# Altium PCB RFM_Temperature_2.0.0.PcbDoc
Units mil, origin at the board's own origin, x right, y up, seen from the top; angles counter-clockwise.
Board outline 1062.99 x 1074.8 mil, 2 copper layers (L1, L4), stack 57.952 mil thick; 41 components, 29 nets, 149 pads, 63 vias.
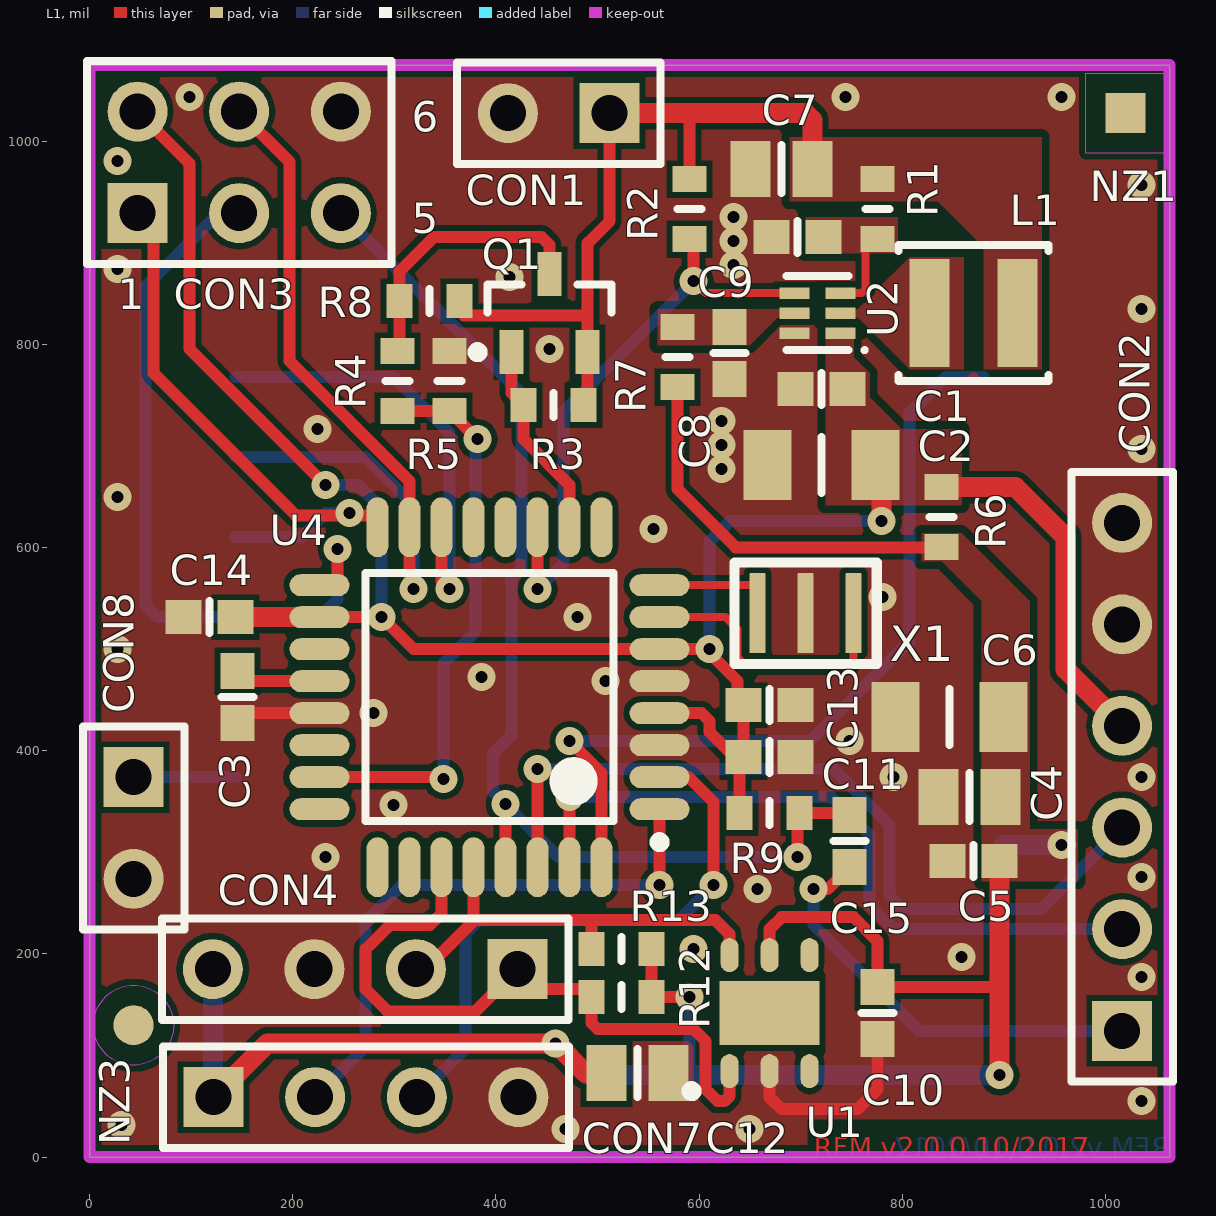
[diagram p0: L1 view]
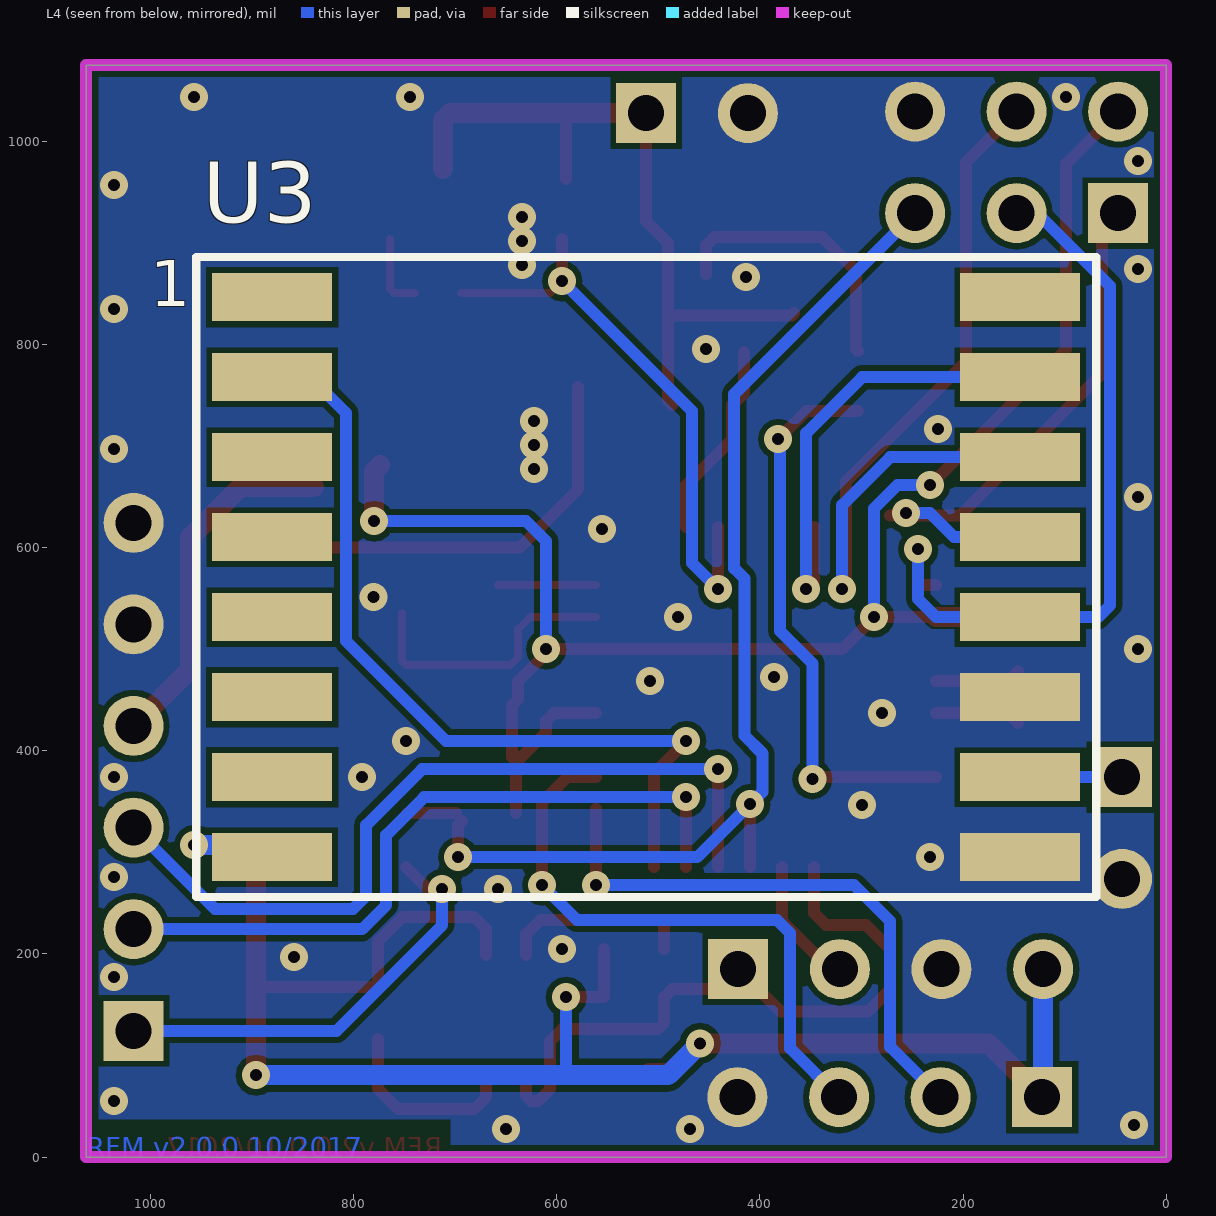
[diagram p1: L4 view, seen from below]
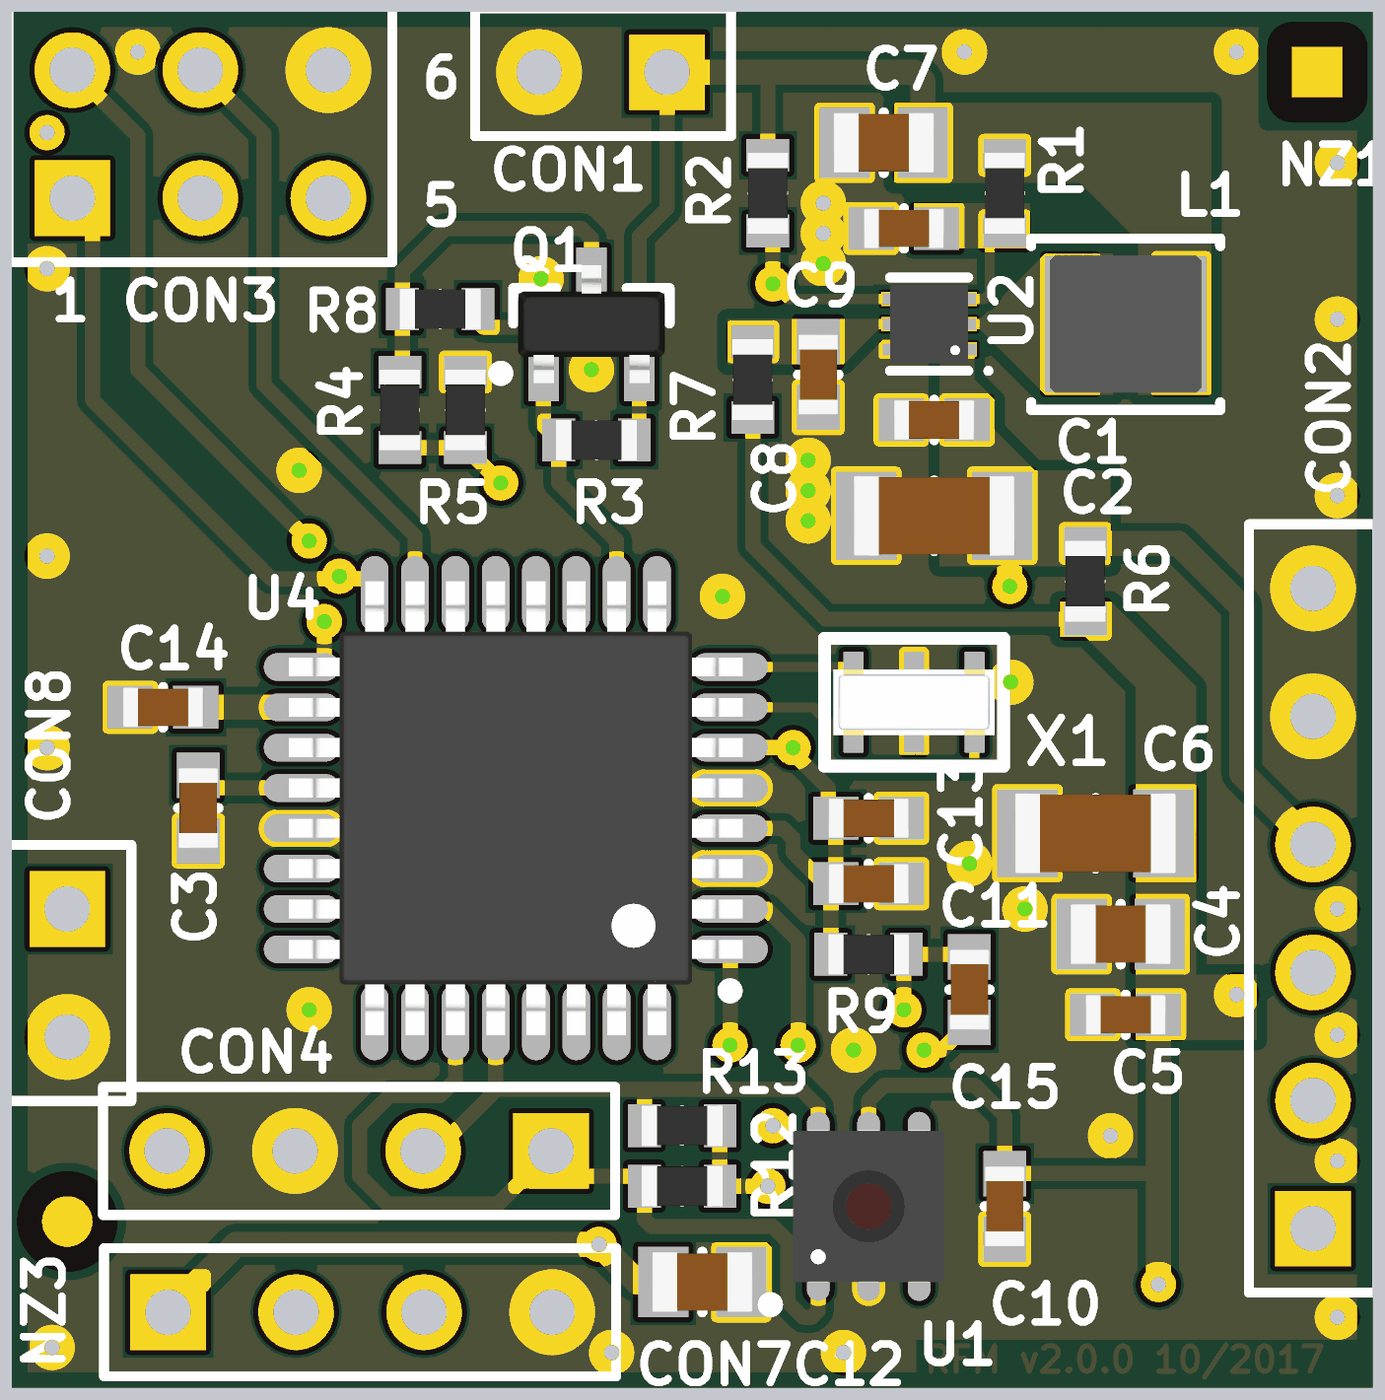
[diagram p2: 3D render of the assembled board from above, using the file's embedded part models]

## Layer stack, top to bottom
Top Solder: solder mask 0.787, Solder Resist, Dk 3.5
L1: signal copper 1.4169
Dielectric 1: core 55.1181, IS400, Dk 4.2
L4: signal copper 1.4169
Bottom Solder: solder mask 0.787, Solder Resist, Dk 3.5

## Board outline
0,0 0,1074.8 1062.99,1074.8 1062.99,0

## Design rules (kind name [scope] priority, off if disabled: settings)
AssemblyTestPointUsage SilkToBoardRegionClearance_1 [All] p2:
AssemblyTestPointUsage SilkToBoardRegionClearance_2 [All] p3:
Clearance [All] p1: gap=6 ignorepadtopadclearanceinfootprint=FALSE except(0: Arc-Hole Track-Hole SMDPad-Hole THPad-Hole Via-Hole Fill-Hole Poly-Hole Region-Hole Text-Hole; 8: Poly-Poly)
ComponentClearance ComponentClearance_Battery [All vs InComponent('BT1')] p1: gap=0 collisioncheckmode=3 verticalgap=0 showdistances=FALSE
ComponentClearance [All] p2: gap=10 collisioncheckmode=3 verticalgap=10 showdistances=FALSE
HoleSize [All] p1: absolutevalues=TRUE maxlimit=250 minlimit=11.81 maxpercent=80.000 minpercent=20.000
MatchedLengths DiffPair_DIFF100MatchedLengths [InDifferentialPairClass('DIFF100')] p1: tolerance=6 checknetsindiffpair=TRUE checkdiffpairvsdiffpair=FALSE checkxsignals=FALSE checkothers=FALSE
MinimumSolderMaskSliver [All] p1: minsoldermaskwidth=3.94
MinimumSolderMaskSliver SilkscreenOverComponentPads_2 [All] p2: minsoldermaskwidth=10
MinimumSolderMaskSliver SilkToSolderMaskClearance_1 [IsPad] p3: minsoldermaskwidth=10
MinimumSolderMaskSliver SilkscreenOverComponentPads_1 [All] p4: minsoldermaskwidth=10
MinimumSolderMaskSliver SilkToSolderMaskClearance [IsPad] p5: minsoldermaskwidth=10
MinimumSolderMaskSliver SilkscreenOverComponentPads [All] p6: minsoldermaskwidth=10
PolygonConnect [All] p1: connectstyle=Direct reliefconductorwidth=10 reliefentries=4 polygonreliefangle="90 Angle" airgapwidth=10
RoutingVias [All] p1: holewidth=11.81 width=27.56 viastyle="Through Hole" minholewidth=11.81 minwidth=25.59 maxholewidth=39.37 maxwidth=50
SilkToSolderMaskClearance SilkToSolderMaskClearance_2 [IsPad] p1: minsilkscreentomaskgap=10 clearancetoexposedcopper=TRUE
SolderMaskExpansion SolderMaskExpansion_Via [IsVia] p1: expansion=0.39 soldermaskfromhole=TRUE
SolderMaskExpansion [All] p2: expansion=4
Width [All] p1: maxlimit=100 minlimit=6 preferedwidth=10
26 further rules are at their usual default settings.

## Classes and differential pairs
differential pair class DIFF100: CH1_TRX0 CH1_TRX1 CH1_TRX2 CH1_TRX3 CH2_TRX0 CH2_TRX1 CH2_TRX2 CH2_TRX3 CLK1 DRAM_SDCKL0 DRAM_SDCKL1 DRAM_SDQS0 DRAM_SDQS1 DRAM_SDQS2 DRAM_SDQS3 DRAM_SDQS4 DRAM_SDQS5 DRAM_SDQS6 DRAM_SDQS7 HDMI_CLK HDMI_D0 HDMI_D1 HDMI_D2 HDMI_OUT_CLK HDMI_OUT_D0 HDMI_OUT_D1 HDMI_OUT_D2 PCIE_REFCLK
differential pair class DIFF90: PCIE_CRX PCIE_CTX PCIE_RX PCIE_TX USB_HOST_D USB_OTG_D
net class "Power Net": NetC8_2 VCC_CPU

## Components (designator, comment, footprint, x,y, rotation, side; value= is the part's Value field where it differs from the comment)
C1 "10uF/6.3V/X5R" C-0603 720.47,755.91 r0 top
C2 "100u/10V X5R" C-1206 720.47,681.1 r0 top
C3 "100nF/16V" C-0603 145.67,452.76 r90 top
C4 "10u/10V" C-0805 866.14,354.33 r0 top
C5 "100nF/16V" C-0603 870.08,291.33 r0 top
C6 "100u/10V X5R" C-1206 846.46,433.07 r0 top
C7 "10u/10V" C-0805 681.1,972.44 r0 top
C8 "10uF/6.3V/X5R" C-0603 629.92,791.34 r90 top
C9 "100nF/16V" C-0603 696.85,905.51 r0 top
C10 "100nF/16V" C-0603 775.59,141.73 r90 top
C11 "100nF/16V" C-0603 669.29,393.7 r180 top
C12 "10u/10V" C-0805 539.37,82.68 r180 top
C13 "100nF/16V" C-0603 669.29,444.88 r180 top
C14 "100nF/16V" C-0603 118.11,531.5 r0 top
C15 "100nF/16V" C-0603 748.03,311.02 r270 top
CON1 "PAD1G02" HDR1X02S 511.81,1027.56 r180 top
CON2 "PAD1G06" HDR1X06S 1016.39,124.39 r90 top
CON3 "PAD2G06" HDR2X06S 47.24,929.13 r0 top
CON4 "PAD1G04" HDR1X04S 421.26,185.04 r180 top
CON7 "PAD1G04" HDR1X04S 122.04,59.05 r0 top
CON8 "PAD1G02" HDR1X02S 43.31,374.02 r270 top
L1 "SRN3015-4R7M" TLU-SRN3015 870.08,830.71 r180 top
NZ1 "Fiducial Rectangle" "Fiducial Rectangle" 1019.68,1027.56 r0 top
NZ3 "Fiducial Circle" "Fiducial Circle" 43.31,129.92 r90 top
Q1 "FDV304P" SOT23-3L 452.76,830.71 r90 top
R1 "470R" R-0603 775.59,933.07 r270 top value=470
R2 "1.87M 1%" R-0603 590.55,933.07 r90 top value=1.87M
R3 "100k 1%" R-0603 456.69,740.16 r0 top value=100k
R4 "787k 1%" R-0603 303.15,763.78 r90 top value=787k
R5 "100k 1%" R-0603 354.33,763.78 r270 top value=100k
R6 "0R" R-0603 838.58,629.92 r90 top value=0
R7 "0R" R-0603 578.74,787.4 r90 top value=0
R8 "0R" R-0603 334.65,842.52 r0 top value=0
R9 "10k" R-0603 669.29,338.58 r180 top
R12 "2.2k" R-0603 523.62,157.48 r0 top
R13 "2.2k" R-0603 523.62,204.72 r0 top
U1 "SI7006-A20" "DFN100P300X300X60_HS-7N - duplicate" 669.29,141.73 r90 top
U2 "TPS610986" SON50P150X80-6N 716.54,830.71 r180 top
U3 "RFM69HW-868" RFM69HW-XXXS2 511.82,570.87 r180 bottom
U4 "ATmega328P-AU" TQFP80P900X900X120-32N 393.7,452.76 r180 top
X1 "Resonator 8MHz" Resonator 704.72,535.43 r0 top

## Footprints (in the part's own frame and the unit in brackets; to place one, negate y for a bottom-side part, rotate by r counter-clockwise, add the part's x,y. Pads: shape width x height; smd on the part's side, far side on the other; paste and mask are expansions set on the pad)
C-0603 [mm]
  rect 0.9x0.85 smd: 1(-0.65,0) 2(0.65,0)
  silkscreen extent 0,-0.4 0,0.4, body extent -0.8,-0.4 0.8,0.4, height 0.8
C-0805 [mm]
  rect 1x1.4 smd: 1(-0.775,0) 2(0.775,0)
  silkscreen extent 0,-0.6 0,0.6, body extent -1,-0.6 1,0.6, height 1.2
C-1206 [mm]
  rect 1.2x1.75 smd: 1(-1.35,0) 2(1.35,0)
  silkscreen extent 0,-0.7 0,0.7, body extent -1.6,-0.8 1.6,0.8, height 1.6
"DFN100P300X300X60_HS-7N - duplicate" [mm] "DFN, 6-Leads, Body 3,00x3,00mm, Pitch 1,00mm, Thermal Pad 1,50x2,40mm, IPC Medium Density"
  rrect20% 1x1 on Top Paste paste+0 mask-5: 0(0,0.65) 0(0,-0.65)
  oval 0.85x0.45 smd: 1(-1.45,1) 2(-1.45,0) 3(-1.45,-1) 4(1.45,-1) 5(1.45,0) 6(1.45,1)
  rect 1.6x2.5 smd paste-5: 7(0,0)
  silkscreen extent -2.07,1.82 -1.83,2.07, body extent -1.51,-1.5 1.51,1.5, height 0.75
"Fiducial Circle" [mm]
  round 1 smd paste-0.75 mask+0.5: 0(0,0)
  L1 keep-out region: 0,1 0.434,0.901 0.782,0.623 0.975,0.223 0.975,-0.223 0.782,-0.623 0.434,-0.901 0,-1 0,-1 -0.434,-0.901 -0.782,-0.623 -0.975,-0.223 -0.975,0.223 -0.782,0.623 -0.434,0.901 0,1
"Fiducial Rectangle" [mm]
  rect 1x1 smd paste-0.75 mask+0.5: 0(0,0)
  L1 keep-out region: -1,1 1,1 1,-1 -1,-1
HDR1X02S [mm] "Connector; Header; 2 Position"
  rect 1.5x1.5 hole 0.9: 1(0,0)
  round 1.5 hole 0.9: 2(2.54,0)
  silkscreen extent -1.27,-1.27 3.81,1.27
HDR1X04S [mm] "Connector; Header; 4 Position"
  rect 1.5x1.5 hole 0.9: 1(0,0)
  round 1.5 hole 0.9: 2(2.54,0) 3(5.08,0) 4(7.62,0)
  silkscreen extent -1.27,-1.27 8.89,1.27
HDR1X06S [mm] "Connector; Header; 6 Position"
  rect 1.5x1.5 hole 0.9: 1(0,0)
  round 1.5 hole 0.9: 2(2.54,0) 3(5.08,0) 4(7.62,0) 5(10.16,0) 6(12.7,0)
  silkscreen extent -1.27,-1.27 13.97,1.27
HDR2X06S [mm] "Connector; Header; 3x2 Position"
  rect 1.5x1.5 hole 0.9: 1(0,0)
  round 1.5 hole 0.9: 2(0,2.54) 3(2.54,0) 4(2.54,2.54) 5(5.08,0) 6(5.08,2.54)
  silkscreen extent -1.27,-1.27 6.35,3.81
R-0603 [mm]
  rect 0.65x0.85 smd: 1(-0.75,0) 2(0.75,0)
  silkscreen extent 0,-0.3 0,0.3, body extent -0.8,-0.4 0.8,0.4, height 0.4
Resonator [mm] "Ceramic Resonator"
  rrect10% 0.4x2 smd: 1(-1.2,0) 2(0,0) 3(1.2,0)
  silkscreen extent -1.78,-1.27 1.78,1.27, body extent -1.6,-0.65 1.6,0.65, height 0.7
RFM69HW-XXXS2 [mm] "RFM69HW-XXXS2"
  rect 3x1.2 smd: 1(-9.35,7) 2(-9.35,5) 3(-9.35,3) 4(-9.35,1) 5(-9.35,-1) 6(-9.35,-3) 7(-9.35,-5) 8(-9.35,-7) 9(9.35,-7) 10(9.35,-5) 11(9.35,-3) 12(9.35,-1) 13(9.35,1) 14(9.35,3) 15(9.35,5) 16(9.35,7)
  silkscreen extent -11.25,-8 11.25,8, body extent -9.85,-8 9.85,8, height 1.9
SON50P150X80-6N [mm] "SON, 6-Leads, Body 1,50x1,50mm, Pitch 0,50mm, IPC Medium Density"
  rect 0.75x0.28 smd paste-0.025 mask+0.05: 1(-0.575,0.5) 2(-0.575,0) 3(-0.575,-0.5) 4(0.575,-0.5) 5(0.575,0) 6(0.575,0.5)
  silkscreen extent -1.22,-0.93 0.77,0.97, body extent -0.78,-0.77 0.78,0.77, height 0.8
SOT23-3L [mm] "SOT23, 3-Leads, Body 2,90x2,48mm, Pitch 0,95mm, IPC High Density"
  rect 1.1x0.6 smd: 1(-0.975,0.95) 2(-0.975,-0.95) 3(0.975,0)
  silkscreen extent -1.1,-1.55 0.71,1.92, body extent -1.17,-1.46 1.17,1.46, height 1
TLU-SRN3015 [mm] "Precision Wire Wound Inductor, 2-Leads, Body 3,0x3,0mm"
  rect 1x2.7 smd: 1(-1.1,0) 2(1.1,0)
  silkscreen extent -1.88,-1.7 1.88,1.7, body extent -1.51,-1.36 1.51,1.36, height 1.5
TQFP80P900X900X120-32N [mm] "TQFP, 32-Leads, Body 7,00x7,00mm, Pitch 0,80mm, IPC Medium Density"
  oval 1.5x0.55 smd: 1(-4.25,2.8) 2(-4.25,2) 3(-4.25,1.2) 4(-4.25,0.4) 5(-4.25,-0.4) 6(-4.25,-1.2) 7(-4.25,-2) 8(-4.25,-2.8) 17(4.25,-2.8) 18(4.25,-2) 19(4.25,-1.2) 20(4.25,-0.4) 21(4.25,0.4) 22(4.25,1.2) 23(4.25,2) 24(4.25,2.8)
  oval 0.55x1.5 smd: 9(-2.8,-4.25) 10(-2,-4.25) 11(-1.2,-4.25) 12(-0.4,-4.25) 13(0.4,-4.25) 14(1.2,-4.25) 15(2,-4.25) 16(2.8,-4.25) 25(2.8,4.25) 26(2,4.25) 27(1.2,4.25) 28(0.4,4.25) 29(-0.4,4.25) 30(-1.2,4.25) 31(-2,4.25) 32(-2.8,4.25)
  silkscreen extent -4.38,-3.1 3.1,3.75, body extent -4.5,-4.5 4.5,4.5, height 1.2

## Part data
C1 C8: library part CMP-00255-2, "SMD Ceramic Capacitor 0603 10uF/6.3V/X5R", Package=0603, Helios ID="CAP-0603 10uF/6.3V/X5R", Type=SMT
C2 C6: library part CMP-00294-5, "SMD Ceramic Capacitor 1206 100u/10V X5R", Package=1206, Helios ID="CAP-1206 100u/10V X5R", Type=SMT
C3 C5 C9 C10 C11 C13 C14 C15: library part CMP-00250-2, "SMD Ceramic Capacitor 0603 100nF/16V", Package=0603, Helios ID="CAP-0603 100nF/16V", Type=SMT
C4 C7 C12: library part CMP-00295-2, "SMD Ceramic Capacitor 0805 10u/10V", Package=0805, Helios ID="CAP-0805 10u/10V", Type=SMT
CON1: library part CMP-00005-2, "1x2pin single row pads, 2.54mm", Helios ID=CON-PAD1G02, Type=TH
CON2: library part CMP-00343-3, "1x6pin single row pads, 2.54mm", Helios ID=CON-PAD1G06, Type=TH
CON3: library part CMP-00360-3, "2x3pin dual row pads, 2.54mm", Helios ID=CON-PAD2G06, Type=TH
CON4 CON7: library part CMP-00006-4, "1x4pin single row pads, 2.54mm", Helios ID=CON-PAD1G04, Type=TH
CON8: library part CMP-00005-1, "1x2pin single row pads, 2.54mm", Helios ID=KON-PAD1G02, LatestRevisionDate=17-Jul-2002, LatestRevisionNote="Re-released for DXP Platform.", Publisher="Altium Limited", Type=TH
L1: library part CMP-00463-1, "Shielded inductor 4.7uH/1.2A 3x3mm", Helios ID=IND-SRN3015-4R7M, HelpURL=http://www.bourns.com/docs/Product-Datasheets/SRN3015.pdf, Type=SMT
NZ1: library part CMP-00041-3, Helios ID=x004, Type=MECH
NZ3: library part CMP-00042-4, Helios ID=x005, Type=MECH
Q1: library part CMP-00186-2, "P-Channel Digital FET 25V, 460mA", Package=SOT23, Helios ID=TRA-FDV304P, HelpURL=http://www.fairchildsemi.com/ds/FD/FDV304P.pdf, Type=SMT
R1: library part CMP-00095-3, "SMD Resistor 0603 470R", Package=0603, Helios ID="RES-0603 470R", Type=SMT
R2: library part CMP-00478-1, "SMD Resistor 0603 1.87M 1%", Package=0603, Helios ID="RES-0603 1.87M 1%", Type=SMT
R3 R5: library part CMP-00033-3, "SMD Resistor 0603 100k 1%", Package=0603, Helios ID="RES-0603 100k 1%", Type=SMT
R4: library part CMP-00126-4, "SMD Resistor 0603 787k 1%", Package=0603, Helios ID="RES-0603 787k 1%", Type=SMT
R6 R7 R8: library part CMP-00032-4, "SMD Resistor 0603 0R", Package=0603, Helios ID="RES-0603 0R", IFS PN=100039, Type=SMT
R9: library part CMP-00036-4, "SMD Resistor 0603 10k", Package=0603, Helios ID="RES-0603 10k", IFS PN=100042, Type=SMT
R12 R13: library part CMP-00080-3, "SMD Resistor 0603 2k2", Package=0603, Helios ID="RES-0603 2k2", Type=SMT
U1: library part CMP-00470-5, "I2C Humidity and Temperature Sensor", Package=DFN6, Helios ID=IC-SI7006-A20-IM1, HelpURL=https://www.silabs.com/Support%20Documents/TechnicalDocs/Si7006-A20.pdf, IFS PN=100188, Type=SMT
U2: library part CMP-00462-2, "Ultra-Low Quiescent Current Synchronous Boost with Integrated Load Switch", Package=DSE6, Helios ID=IC-TPS610986DSE, HelpURL=http://www.ti.com/lit/gpn/tps610986, Type=SMT
U3: library part CMP-00469-4, "RFM69HW ISM TRANSCEIVER MODULE", Helios ID=RF-RFM69HW-868S2, HelpURL=http://www.hoperf.com/upload/rf/RFM69HW-V1.3.pdf, IFS PN=100184, Type=SMT
U4: "8-bit AVR Microcontroller, 32KB Flash, 1KB EEPROM, 2KB SRAM, 32-pin TQFP, Industrial Grade (-40°C to 85°C)", Code_JEDEC=MS-026-ABA, ComponentLink1Description="Manufacturer URL", ComponentLink1URL=http://www.atmel.com/, ComponentLink2Description="ATmega48A/48PA/88A/88PA/168A/168PA/328/328P Datasheet", ComponentLink2URL=http://www.atmel.com/dyn/resources/prod_documents/doc8271.pdf, ComponentLink3Description="ATmega48A/48PA/88A/88PA/168A/168PA/328/328P Summary", ComponentLink3URL=http://www.atmel.com/dyn/resources/prod_documents/8271S.pdf, DatasheetVersion="revD, May-2011", PackageDescription="32-Lead, 7x7x1.0 mm Body, 0.8mm Lead Pitch, Thin Profile Plastic Quad Flat Package (TQFP)", PackageReference=32A, PackageVersion="revC, Oct-2010", RevisionNote="DatasheetVersion & PackageVersion updated. URLs added."

## Via types
v1: diameter 27.56, hole 11.81, L1 to L4, 63 vias

## Nets (pads, with @x,y where several pads share a name; then routed paths per layer and width w, separated by ;. In a path a pad name is that pad's centre, name@x,y a point inside that pad or via, vN(x,y) a via of type N, cw(c..) or ccw(c..) an arc to the next point about the centre after c; other vN are vias at no path point)
ADC: R4.1 R5.2 U4.23 | length 561.3
  L1 w11.81: U4.23 346.46,374.02 v1(348.33,372.14) ; R4.1 R5.2 v1(381.89,706.69)
  L4 w11.81: v1(348.33,372.14) 348.33,486.13 380.02,517.81 380.02,704.82 v1(381.89,706.69)
AREF: C3.2 U4.20 | length 84.8
  L1 w11.81: C3.2 155.51,468.5 U4.20
DTR: C15.2 CON2.1 | length 426.7
  L1 w11.81: v1(712.6,263.78) 726.38,263.78 C15.2
  L4 w11.81: v1(712.6,263.78) 712.6,228.35 816.55,124.39 CON2.1
GND: C1.1 C2.1 C3.1 C4.1 C5.1 C6.1 C7.1 C8.1 C9.1 C10.1 C11.1 C12.1 C13.1 C14.1 CON1.2 CON2.5 CON2.6 CON3.6 CON4.3 CON7.4 CON8.2 R5.1 U1.2 U2.6 U3.9 U3.11 U4.3 U4.5 U4.21 X1.2 | length 278.9
  L1 w11.81: C3.1 155.51,437.01 U4.21 ; U1.2 669.29,59.06 681.1,47.24 755.91,47.24 775.59,66.93 C10.1
  other v1: 468.5,27.56 649.61,27.56 31.5,31.5 1035.43,55.12 1035.43,177.17 858.27,196.85 594.49,204.72 657.48,263.78 1035.43,275.59 232.28,295.28 299.21,346.46 791.34,374.02 1035.43,374.02 748.03,409.45 279.53,437.01 507.87,468.5 385.83,472.44 27.56,500 480.31,531.5 780.31,551.18 555.12,618.11 27.56,649.61 622.05,677.17 1035.43,696.85 622.05,700.79 224.41,716.54 622.05,724.41 452.76,795.28 1035.43,834.65 413.39,866.14 27.56,874.02 633.86,877.95 633.86,901.57 633.86,925.2 1035.43,956.69 27.56,980.32 98.43,1043.31 744.09,1043.31 956.69,1043.31
MEAS_EN: Q1.1 R3.1 U4.10 | length 195.9
  L1 w11.81: Q1.1 415.35,751.97 R3.1 427.17,706.69 472.44,661.42 U4.10
NetC8_2: C8.2 R7.2 U2.5
NetC9_2: C9.2 R1.2 U2.3 | length 75.4
  L1 w7.87: U2.3 759.84,850.39 763.78,854.33 R1.2@763.78,903.54
NetCON8_1: CON8.1 U3.10 | length 100.4
  L4 w11.81: CON8.1 U3.10
NetL1_2: L1.2 U2.2
NetQ1_3: Q1.3 R4.2 R8.1 | length 272.9
  L1 w11.81: R4.2 305.12,795.28 305.12,838.58 305.12,872.05 338.58,905.51 444.88,905.51 452.76,897.64 Q1.3
NetU4_7: U4.7 X1.3 | length 275.5
  L1 w7.87: U4.7 625.98,531.5 637.8,519.68 637.8,492.13 645.67,484.25 748.03,484.25 751.97,488.19 X1.3
NetU4_8: U4.8 X1.1 | length 96.5
  L1 w7.87: U4.8 X1.1@657.48,562.99
NRF_CE: U4.13
PinD4: CON7.3 U4.2 | length 590.1
  L1 w11.81: U4.2 589.64,374.02 614.17,349.48 v1(614.17,267.72)
  L4 w11.81: CON7.3 370.08,107.09 370.08,220.47 382.97,233.36 579.82,233.36 v1(614.17,267.72)
RESET: C15.1 CON3.5 R9.1 U4.29 | length 1130.1
  L1 w11.81: U4.29 v1(409.45,347.44) ; R9.1@692.91,330.71 696.85,326.77 v1(696.85,295.28) ; R9.1 746.06,338.58 C15.1
  L4 w11.81: CON3.5 425.2,751.18 425.2,579.63 415.26,569.69 415.26,415.26 397.31,397.31 397.31,359.58 v1(409.45,347.44) 461.61,295.28 v1(696.85,295.28)
RFM_INT: U3.2 U4.32 | length 824.4
  L1 w11.81: v1(472.44,409.45) 503.94,377.95 U4.32
  L4 w11.81: v1(472.44,409.45) 708.66,409.45 807.09,507.87 807.09,732.28 842.52,767.72 U3.2
RFM_MISO: CON3.1 U3.13 U4.16 | length 552.7
  L1 w11.81: CON3.1 62.99,913.39 62.99,771.65 202.85,631.8 271.75,631.8
  L4 w11.81: U3.13 208.66,610.24 232.28,633.86 v1(255.91,633.86)
RFM_MOSI: CON3.4 U3.14 U4.15 | length 818.6
  L1 w11.81: CON3.4 196.85,979.53 196.85,783.46 314.96,665.35 U4.15 314.96,562.99 v1(318.9,559.06)
  L4 w11.81: U3.14 271.65,688.98 318.9,641.73 v1(318.9,559.06)
RFM_MSCL: CON3.3 U3.12 U4.17 | length 739.5
  L1 w11.81: U4.17 244.09,562.99 v1(244.1,598.42)
  L4 w11.81: CON3.3 126.87,929.13 55.12,857.38 55.12,543.31 66.93,531.5 U3.12 226.38,531.5 244.1,549.21 v1(244.1,598.42)
RFM_NSS: U3.15 U4.14 | length 451.3
  L1 w11.81: U4.14 346.46,566.93 v1(354.33,559.06)
  L4 w11.81: U3.15 299.21,767.72 354.33,712.6 v1(354.33,559.06)
RXI: CON2.3 U4.30 | length 802.9
  L1 w11.81: U4.30 v1(440.94,381.89)
  L4 w11.81: v1(440.94,381.89) 732.28,381.89 787.4,326.77 787.4,257.32 800.63,244.09 936.09,244.09 CON2.3
SCL: CON4.2 R13.1 U1.6 U4.28 | length 433.4
  L1 w11.81: CON4.2 330.71,185.04 377.95,232.28 U4.28 ; 377.95,233.36 616.05,233.36 629.92,219.49 U1.6 ; R13.1 494.09,230.32
SDA: CON4.1 R12.1 U1.1 U4.27 | length 681.7
  L1 w11.81: U4.27 346.46,240.16 334.65,228.35 295.28,228.35 271.65,204.72 271.65,165.35 293.4,143.61 379.82,143.61 CON4.1 440.94,165.35 486.22,165.35 R12.1 494.09,131.89 500,125.98 594.49,125.98 606.3,114.17 606.3,66.93 618.11,55.12 625,55.12 629.92,60.03 U1.1
SUB_EN: R2.1 U2.4 U4.11 | length 573.4
  L1 w7.87: v1(594.49,862.2) 606.3,850.39 U2.4
  L1 w11.81: v1(440.94,559.06) U4.11 ; v1(594.49,862.2) R2.1@594.49,903.54
  L4 w11.81: v1(440.94,559.06) 466.54,584.65 466.54,734.25 v1(594.49,862.2)
TEMP_HUM: CON7.2 U4.1 | length 572.6
  L1 w11.81: v1(561.02,267.72) U4.1
  L4 w11.81: CON7.2 271.65,108.66 271.65,232.28 307.09,267.72 v1(561.02,267.72)
TXO: CON2.2 U4.31 | length 707
  L1 w11.81: U4.31 v1(472.44,354.33)
  L4 w11.81: v1(472.44,354.33) 730.32,354.33 767.72,316.93 767.72,248.03 791.35,224.39 CON2.2
VCC_3V3: C4.2 C5.2 C6.2 C10.2 C12.2 CON4.4 CON7.1 R6.1 R7.1 R12.2 R13.2 U1.5 U3.8 | length 2123
  L1 w11.81: R13.2 R12.2 v1(590.55,157.48) ; R7.1 578.74,657.48 635.92,600.3 838.49,600.3 R6.1 ; U1.5 669.29,224.41 681.1,236.22 751.97,236.22 775.59,212.6 C10.2 893.7,167.32 895.67,169.29
  L1 w19.68: CON7.1 175.1,112.11 v1(458.76,112.11) 488.19,82.68 C12.2 ; v1(895.67,80.71) 895.67,169.29 C5.2
  L4 w11.81: 590.55,80.71 v1(590.55,157.48)
  L4 w19.68: CON4.4 121.26,59.84 CON7.1 ; v1(458.76,112.11) 490.16,80.71 590.55,80.71 v1(895.67,80.71) ; U3.8@899.61,307.09 v1(956.69,307.09)
VCC_BAT: C7.2 CON1.1 L1.1 Q1.2 R1.1 R2.2 R3.2 R8.2 | length 738.9
  L1 w11.81: R8.2@366.14,830.71 368.6,828.25 490.16,828.25 ; R3.2 490.16,744.09 Q1.2 490.16,828.25 ; CON1.1 511.81,921.26 490.16,899.61 490.16,828.25 ; R2.2 590.55,1027.56
  L1 w19.68: CON1.1 704.72,1027.56 711.61,1020.67 C7.2
VCC_CPU: C1.2 C2.2 C11.2 C13.2 C14.2 CON2.4 CON3.2 R6.2 R9.2 U2.1 U4.4 U4.6 U4.18 | length 2070.2
  L1 w11.81: CON3.2 98.43,977.95 98.43,795.28 v1(232.28,661.42) ; U4.18 v1(287.4,531.5) 318.9,500 U4.6 606.3,500 637.8,468.5 637.8,450.79 C13.2 C11.2 C11.2@634.94,393.7 ; U4.4 602.36,437.01 610.24,429.13 610.24,418.4 C11.2@634.94,393.7 ; R9.2 639.76,388.87 C11.2@634.94,393.7
  L1 w19.68: C14.2 U4.18 ; C2.2 779.53,675.2 v1(779.53,625.98) ; R6.2 911.42,659.45 960.63,610.24 960.63,480.15 CON2.4
  L4 w11.81: v1(232.28,661.42) 264.67,661.42 287.4,638.69 v1(287.4,531.5) ; v1(610.24,500) 610.24,606.3 629.92,625.98 v1(779.53,625.98)
pads on no net: NZ1.0 NZ3.0 U1.0 U1.3 U1.4 U1.7 U3.1 U3.3 U3.4 U3.5 U3.6 U3.7 U3.16 U4.9 U4.12 U4.19 U4.22 U4.24 U4.25 U4.26

## Polygon pours and split planes (outlines as drawn)
NetC8_2 on L1 "L01_NETC8_2_P038" (solid, remove dead copper, pour order 38): 708.66,834.65 559.06,834.65 559.06,799.21 649.61,799.21 677.17,826.77 708.66,826.77
NetC9_2 on L1 "L01_NETC9_2_P036" (solid, remove dead copper, pour order 36): 795.28,889.76 704.72,889.76 704.72,925.2 795.28,925.2
VCC_CPU on L1 "L01_VCC_CPU_P034" (solid, remove dead copper, pour order 34): 724.41,814.96 724.41,641.73 858.27,641.73 858.27,716.54 799.21,716.54 767.72,748.03 767.72,771.65 751.97,787.4 751.97,814.96
VCC_BAT on L1 "L01_VCC_BAT_P032" (solid, remove dead copper, pour order 32): 688.98,940.94 834.65,940.94 879.92,895.67 879.92,775.59 937.01,775.59 937.01,1003.94 688.98,1003.94
NetL1_2 on L1 "L01_NETL1_2_P030" (solid, remove dead copper, pour order 30): 724.41,826.77 755.91,826.77 807.09,775.59 860.24,775.59 860.24,885.83 807.09,885.83 755.91,834.65 724.41,834.65
VCC_3V3 on L1 "L01_VCC_3V3_P044" (solid, remove dead copper, pour order 44): 818.9,614.17 858.27,614.17 925.2,547.24 925.2,322.83 972.44,322.83 972.44,271.65 877.95,271.65 877.95,547.24 838.58,586.61 818.9,586.62
GND on L1 "L01_GND_P050" (solid, remove dead copper, pour order 50): 0,1072.22 0,0 1062.99,0 1062.99,1072.22
GND on L4 "L02_GND_P048" (solid, remove dead copper, pour order 48): 0,1072.22 0,0 1062.99,0 1062.99,1072.22

## Keep-outs
Keep-Out Layer:
  the board outline again, w11.81

## Other copper
L1:
  text "RFM v2.0.0 10/2017" at 712.6,0 h19.68
L4:
  text "RFM v2.0.0 10/2017" at 1062.99,0 h19.68

## Text inside footprints (layer, text, board x,y; h text height)
CON3: Top Overlay "5" at 317.24,909.13 h30; Top Overlay "6" at 317.24,1009.13 h30; Top Overlay "1" at 27.56,834.65 h30
U3: Mechanical 14 "1" at 796.65,818.9 h77.5; Bottom Overlay "1" at 1000,822.83 h77.5